# EAGLE board Mighty Kup (EAGLE 9.7.0)

Size 100 x 80 mm. Coordinates in mm from the lower left corner, seen from the top.
Outline: 0,0 100,0 100,80 0,80 0,0
Copper layers (1*16): Top 0.035mm / dielectric 1.5mm / Bottom 0.035mm
Design rules "default": minimum track width 6mil, minimum drill 0.35mm, track to track 6mil, track to pad 6mil, pad to pad 6mil, via to via 6mil, smd to smd 6mil, copper to edge 40mil, drill to drill 6mil, minimum pad ring 10mil, minimum via ring 8mil, stop-mask expansion 4mil, vias tented up to drill 0mil, thermal gap 10mil

## Footprints (pad centres in the part's own frame; a part is rotated, then mirrored left to right if it is on the bottom)
LEDRD254W60D565H860B = drill 0.981 pad 1.581: 1 -1.27,0; 2 1.27,0
LEDRD254W60D565H860B_G = drill 0.981 pad 1.581: 1 -1.27,0; 2 1.27,0
LEDRD254W60D565H860B_Y = drill 0.981 pad 1.581: 1 -1.27,0; 2 1.27,0
LED-RGB-5MM = drill 0.9: B 0.635,0.635; C -0.635,-0.635; G 1.905,-0.635; R -1.905,0.635
GL5528 = drill 0.8 pad 1.4: 1 -1.702,0; 2 1.702,0
RESAD1016W63L850D250B = drill 0.83 pad 1.43: 1 -5.08,0; 2 5.08,0
ARDUINO-UNO-R3-SHIELD = drill 1.016 pad 1.88: 3.3V 24.13,-2.54; 5V 24.13,0; A0 24.13,12.7; A1 24.13,15.24; A2 24.13,17.78; A3 24.13,20.32; A4 24.13,22.86; A5 24.13,25.4; AREF -24.13,-13.97; D2 -24.13,20.32; D3 -24.13,17.78; D4 -24.13,15.24; D5 -24.13,12.7; D6 -24.13,10.16; D7 -24.13,7.62; D8 -24.13,3.81; D9 -24.13,1.27; D10 -24.13,-1.27; D11 -24.13,-3.81; D12 -24.13,-6.35; D13 -24.13,-8.89; GND@0 24.13,2.54; GND@1 24.13,5.08; GND@2 -24.13,-11.43; IOREF 24.13,-7.62; NC 24.13,-10.16; RES 24.13,-5.08; RX -24.13,25.4; SCL -24.13,-19.05; SDA -24.13,-16.51; TX -24.13,22.86; VIN 24.13,7.62

## Placement (x,y rotation side)
D3  LED_RED  [LEDRD254W60D565H860B]  19.13,135.23 180 top  (outside the outline)
D4  LED_GREEN  [LEDRD254W60D565H860B_G]  6.06,110.83 180 top  (outside the outline)
D5  LED_YELLOW  [LEDRD254W60D565H860B_Y]  9.55,122.16 180 top  (outside the outline)
D6  LED-RGBRCBG-PTH  [LED-RGB-5MM]  74.42,7.49 0 top
R1  PHOTOCELL_GL5528  [GL5528]  96.68,45.79 0 top
R2  PHOTOCELL_GL5528  [GL5528]  72.34,76.06 0 top
R3  PHOTOCELL_GL5528  [GL5528]  34.64,41.33 0 top
R4  PHOTOCELL_GL5528  [GL5528]  75.31,19.37 0 top
R5  1k  [RESAD1016W63L850D250B]  218.42,113.78 90 top  (outside the outline)
R6  1k  [RESAD1016W63L850D250B]  53.08,169.65 90 top  (outside the outline)
R7  1k  [RESAD1016W63L850D250B]  9.5,42.1 90 top
R8  1k  [RESAD1016W63L850D250B]  82.91,15.26 90 top
R9  1k  [RESAD1016W63L850D250B]  247.45,127.9 90 top  (outside the outline)
R10  1k  [RESAD1016W63L850D250B]  245.42,105.23 90 top  (outside the outline)
U1  ARDUINO-UNO-R3-SHIELD  [ARDUINO-UNO-R3-SHIELD]  133.6,104.05 270 top  (outside the outline)

## Library data of the parts
D3-D5 = Tinkercad; CATEGORY: Opto-Electronic; SUB-CATEGORY: LED
D6 R1-R10 U1 = Tinkercad

## Nets
R2_1: R2.1 R5.2
R5_1: R5.1 R9.2
U1_D10: D3.2 R9.1 R10.2 U1.D10
U1_D11: D4.2 R6.2 R10.1 U1.D11
U1_D12: D5.2 R6.1 U1.D12
U1_GND: D3.1 D4.1 D5.1 R2.2 U1.A0 U1.GND@0 U1.GND@1 U1.GND@2

## Tracks (layer width: path | path; a pad name or v marks a point on that pad's centre or on a via)
R2_1  (1 unrouted)
R5_1  (1 unrouted)
U1_D10  (3 unrouted)
U1_D11  (3 unrouted)
U1_D12  (2 unrouted)
U1_GND  (7 unrouted)